# EAGLE board haystack_micro (EAGLE 9.1.0)
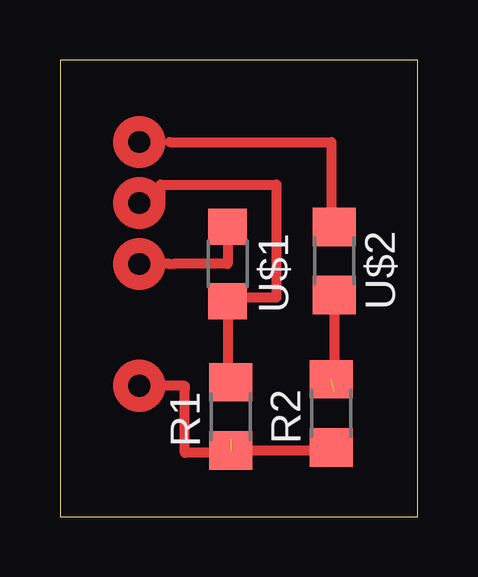
[diagram p0: board, top side]
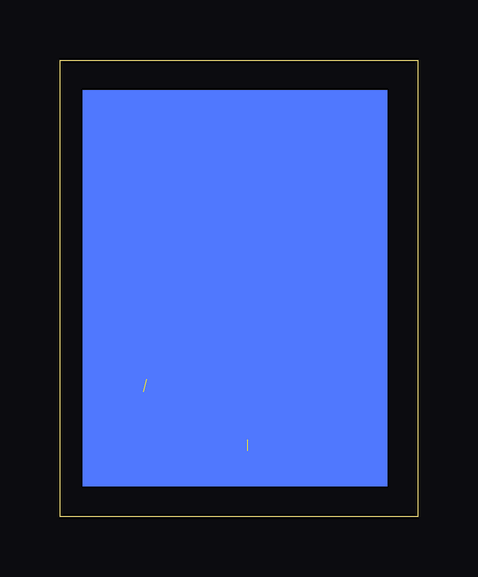
[diagram p1: board, bottom side, seen from below]

Size 14.91 x 19.04 mm. Coordinates in mm from the lower left corner, seen from the top.
Outline: 0,0 14.91,0 14.91,19.04 0,19.04 0,0
Copper layers (1*16): Top 0.035mm / dielectric 1.5mm / Bottom 0.035mm
Design rules "default": minimum track width 6mil, minimum drill 0.35mm, track to track 6mil, track to pad 6mil, pad to pad 6mil, via to via 6mil, smd to smd 6mil, copper to edge 40mil, drill to drill 6mil, minimum pad ring 10mil, minimum via ring 8mil, stop-mask expansion 4mil, vias tented up to drill 0mil, thermal gap 10mil

## Footprints (pad centres in the part's own frame; a part is rotated, then mirrored left to right if it is on the bottom)
R1206 = smd 1.6 x 1.803: 1 -1.422,0; 2 1.422,0
OP1206 = smd 1.5 x 1.6: COLLECTOR -1.55,0; EMITTER 1.55,0
LED1206 = smd 1.6 x 1.803: 1 -1.422,0; 2 1.422,0

## Placement (x,y rotation side)
R1  [R1206]  7.11,4.19 90 top
R2  [R1206]  11.3,4.32 90 top
U$1  PHOTOTRANSISTOR-NPN1206  [OP1206]  6.99,10.54 270 top
U$2  LED  [LED1206]  11.43,10.67 270 top

## Library data of the parts
R1 R2 U$1 U$2 = fab 

## Nets
A2: U$2.1
A3: R1.2 U$1.EMITTER
GND: R1.1 R2.1
N$4: R2.2 U$2.2
VCC: U$1.COLLECTOR

## Tracks (layer width: path | path; a pad name or v marks a point on that pad's centre or on a via)
A3
  Top 0.406: U$1.EMITTER 6.99,5.74 R1.2
GND  (1 unrouted)
  Top 0.406: R2.1 11.3,2.77 7.67,2.77 7.67,3.23 7.11,3.23
N$1
  Top 0.406: 4.57,10.54 4.06,10.54
N$2
  Top 0.406: 4.19,13.08 4.19,13.84 9.02,13.84 9.02,9.14 7.11,9.14
N$3
  Top 0.406: 7.11,2.67 5.21,2.67 5.21,5.33 5.21,5.46 4.19,5.46
N$4  (1 unrouted)
  Top 0.406: U$2.2 11.43,5.21 11.68,5.21
N$5
  Top 0.406: 4.57,15.62 11.3,15.62 11.3,11.94
VCC
  Top 0.406: U$1.COLLECTOR 6.99,10.54 4.74,10.54
(copper drawn outside any net)
  shapes: Bottom area x1, Top circle x5